# Altium PCB 16X16_covert Board.PcbDoc
Units mil, origin at the board's own origin, x right, y up, seen from the top; angles counter-clockwise.
Board outline 3425.2 x 582.68 mil, 2 copper layers (Top Layer, Bottom Layer); 4 components, 1 nets, 68 pads, 58 vias.
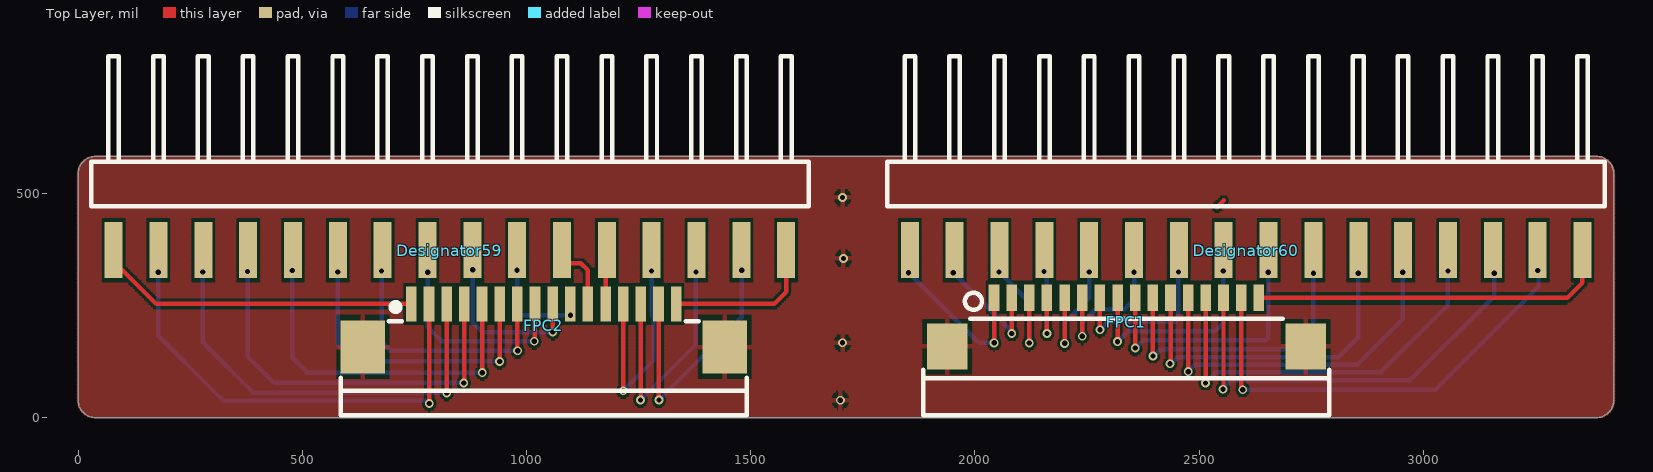
[diagram p0: Top Layer view]
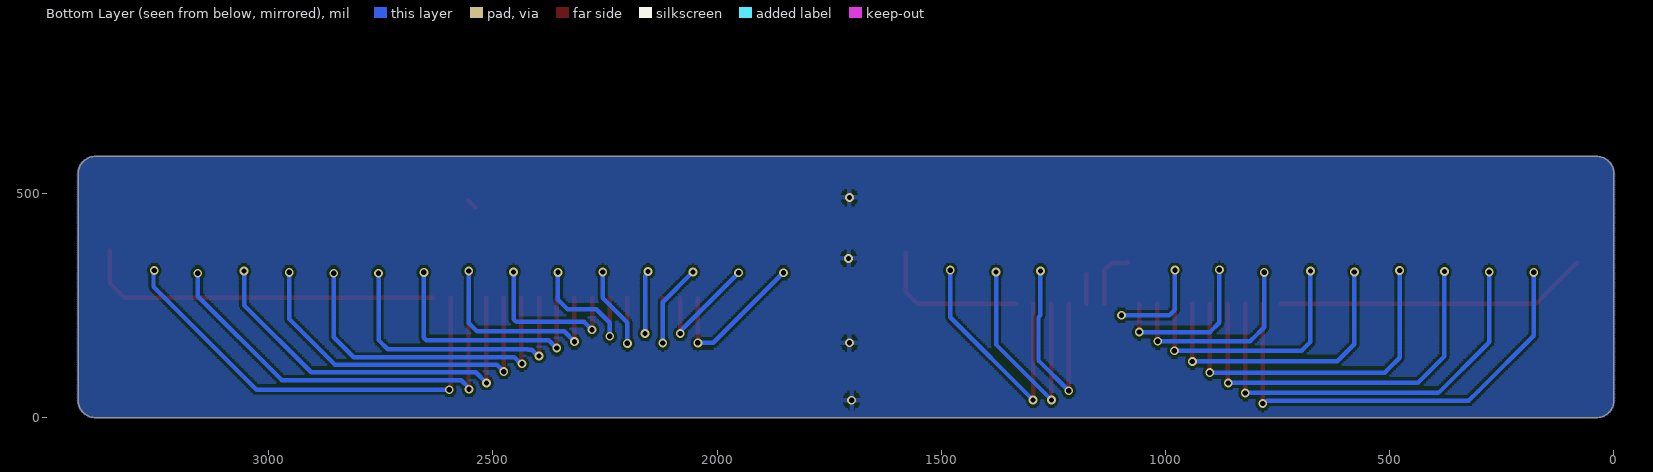
[diagram p1: Bottom Layer view, seen from below]

## Layer stack, top to bottom
Top Solder: solder mask 0.4, Solder Resist, Dk 3.5
Top Layer: signal copper 1.4
Dielectric 1: dielectric 12.6, FR-4, Dk 4.8
Bottom Layer: signal copper 1.4
Bottom Solder: solder mask 0.4, Solder Resist, Dk 3.5

## Board outline
39.37,0 cw(c39.37,39.37) 0,39.37 0,543.31 cw(c39.37,543.31) 39.37,582.68 3385.83,582.68 cw(c3385.83,543.31) 3425.2,543.31 3425.2,39.37 cw(c3385.83,39.37) 3385.83,0

## Design rules (kind name [scope] priority, off if disabled: settings)
Clearance [All] p1: gap=6 ignorepadtopadclearanceinfootprint=FALSE
PolygonConnect [All] p1: connectstyle=Relief reliefconductorwidth=10 reliefentries=4 polygonreliefangle="90 Angle" airgapwidth=10
RoutingVias [All] p1: holewidth=28 width=50 viastyle="Through Hole" minholewidth=28 minwidth=50 maxholewidth=28 maxwidth=50
SolderMaskExpansion [All] p1: expansion=4 istentingtop=FALSE
Width [All] p1: maxlimit=10 minlimit=8 preferedwidth=8
30 further rules are at their usual default settings.

## Components (designator, comment, footprint, x,y, rotation, side; value= is the part's Value field where it differs from the comment)
Designator59 "Comment" CONN-SMD_16PINS 829.33,373.35 r0 top
Designator60 "Comment" CONN-SMD_16PINS 2604.92,373.35 r0 top
FPC1 "1.0K-FX-16PWB" FPC-SMD_16P-P1.00-HDGC_1.0K-FX-16PWB 2337.87,212.83 r0 top
FPC2 "X10B25U16T" FPC-SMD_X10B25U16T 1038.66,205.3 r0 top

## Footprints (in the part's own frame and the unit in brackets; to place one, negate y for a bottom-side part, rotate by r counter-clockwise, add the part's x,y. Pads: shape width x height; smd on the part's side, far side on the other; paste and mask are expansions set on the pad)
CONN-SMD_16PINS [mm] "16PINS_Horizontal Surface Mount_Switch arrangement"
  rect 1.02x3.17 smd mask+0.05: 1(-19.05,0) 2(-16.51,0) 3(-13.97,0) 4(-11.43,0) 5(-8.89,0) 6(-6.35,0) 7(-3.81,0) 8(-1.27,0) 9(1.27,0) 10(3.81,0) 11(6.35,0) 12(8.89,0) 13(11.43,0) 14(13.97,0) 15(16.51,0) 16(19.05,0)
  silkscreen extent -20.32,2.5 20.32,11
FPC-SMD_16P-P1.00-HDGC_1.0K-FX-16PWB [mm]
  rect 0.6x1.5 smd mask+0.05: 1(-7.5,1.375) 2(-6.5,1.375) 3(-5.5,1.375) 4(-4.5,1.375) 5(-3.5,1.375) 6(-2.5,1.375) 7(-1.5,1.375) 8(-0.5,1.375) 9(0.5,1.375) 10(1.5,1.375) 11(2.5,1.375) 12(3.5,1.375) 13(4.5,1.375) 14(5.5,1.375) 15(6.5,1.375) 16(7.5,1.375)
  rect 2.3x2.6 smd mask+0.05: 17(10.15,-1.375) 18(-10.15,-1.375)
  silkscreen extent -11.5,-5.27 11.5,1.67, body extent -11.5,-5.15 11.5,1.65, height 2.58
FPC-SMD_X10B25U16T [mm]
  rect 0.6x2 smd mask+0.051: 1(-7.5,1.225) 2(-6.5,1.225) 3(-5.5,1.225) 4(-4.5,1.225) 5(-3.5,1.225) 6(-2.5,1.225) 7(-1.5,1.225) 8(-0.5,1.225) 9(0.5,1.225) 10(1.5,1.225) 11(2.5,1.225) 12(3.5,1.225) 13(4.5,1.225) 14(5.5,1.225) 15(6.5,1.225) 16(7.5,1.225)
  rect 2.5x3 smd mask+0.051: 17(10.25,-1.225) 18(-10.25,-1.225)
  silkscreen extent -11.5,-5.08 11.5,1.25, body extent -11.5,-5.37 11.5,1.38, height 2.46

## Part data
FPC1: library part FPC_16P_抽屉式下接, JLCPCB Part Class="Extended Part", LCSC Part Name="1mm P数:16 抽屉式 下接", Manufacturer=HDGC(华德共创), Operating Temperature Range=-20℃~+85℃, Add into BOM=yes, Contact Type=下接, Convert to PCB=yes, Datasheet=https://atta.szlcsc.com/upload/public/pdf/source/20211102/926C0C24B01018ECCB068402A8A27F57.pdf, Device=1.0K-FX-16PWB, FFC, FCB Thickness=0.3mm, Height Above Board=2.5mm, Locking Feature=抽屉式, Manufacturer Part=1.0K-FX-16PWB, Mounting Type=卧贴, Name=1.0K-FX-16PWB, Number of Contacts=16, Pitch=1mm, Supplier=LCSC, Supplier Footprint=SMD,P=1mm, Supplier Part=C2914075, Symbol=1.0K-FX-16PWB
FPC2: library part FPC_16P_抽屉式上接, JLCPCB Part Class="Extended Part", LCSC Part Name="1mm P数:16 抽屉式 上接 镀锡", Manufacturer="XKB Connectivity(中国星坤)", Operating Temperature Range=-40℃~+85℃, Welding Temperature (Max)=260℃, Add into BOM=yes, Contact Material=磷青铜, Contact Plating=金, Contact Type=上接, Convert to PCB=yes, Datasheet=https://atta.szlcsc.com/upload/public/pdf/source/20211011/E8BDE13A8FA62B089EE070F29D883999.pdf, Device=X10B25U16T, FFC, FCB Thickness=0.3mm, Height Above Board=2.5mm, Locking Feature=抽屉式, Manufacturer Part=X10B25U16T, Mounting Type=卧贴, Name=X10B25U16T, Number of Contacts=16, Pitch=1mm, Supplier=LCSC, Supplier Footprint=SMD,P=1mm, Supplier Part=C500194, Symbol=X10B25U16T

## Via types
v1: diameter 19.68, hole 11.81, Top Layer to Bottom Layer, tented both sides, 58 vias

## Nets (pads, with @x,y where several pads share a name; then routed paths per layer and width w, separated by ;. In a path a pad name is that pad's centre, name@x,y a point inside that pad or via, vN(x,y) a via of type N, cw(c..) or ccw(c..) an arc to the next point about the centre after c; other vN are vias at no path point)
GND: FPC1.17 FPC1.18 FPC2.17 FPC2.18
  other v1: 1700,39 1705,167 1707,355 1705,491
pads on no net: Designator59.1 Designator59.2 Designator59.3 Designator59.4 Designator59.5 Designator59.6 Designator59.7 Designator59.8 Designator59.9 Designator59.10 Designator59.11 Designator59.12 Designator59.13 Designator59.14 Designator59.15 Designator59.16 Designator60.1 Designator60.2 Designator60.3 Designator60.4 Designator60.5 Designator60.6 Designator60.7 Designator60.8 Designator60.9 Designator60.10 Designator60.11 Designator60.12 Designator60.13 Designator60.14 Designator60.15 Designator60.16 FPC1.1 FPC1.2 FPC1.3 FPC1.4 FPC1.5 FPC1.6 FPC1.7 FPC1.8 FPC1.9 FPC1.10 FPC1.11 FPC1.12 FPC1.13 FPC1.14 FPC1.15 FPC1.16 FPC2.1 FPC2.2 FPC2.3 FPC2.4 FPC2.5 FPC2.6 FPC2.7 FPC2.8 FPC2.9 FPC2.10 FPC2.11 FPC2.12 FPC2.13 FPC2.14 FPC2.15 FPC2.16
copper on no net: | length 17742.2
  Top Layer w10: 82.33,345.35 174.14,253.53 743.39,253.53 ; 782.76,253.53 783.04,253.25 783.04,31.63 v1(783.33,31.35) ; v1@821.33,54.35 v1(822.13,55.14) 822.13,253.53 ; v1(860.33,77.35) 860.91,77.93 860.91,252.95 861.5,253.53 ; 900.87,253.53 900.87,253.88 901.33,254.35 v1(901.33,100.35) ; 940.24,253.53 v1(940.24,125.44) v1@940.33,125.35 ; 979.61,253.53 979.97,253.17 979.97,149.71 v1(980.33,149.35) ; v1(1017.33,170.35) 1018.15,171.17 1018.15,252.71 1018.98,253.53 ; 1058.35,253.53 1058.35,191.33 v1@1059.33,190.35 ; 1084.33,346.35 1086.33,344.35 1121.33,344.35 1137.09,328.59 1137.09,253.53 ; 1176.33,320.35 1176.46,320.22 1176.46,253.53 ; 1215.83,253.53 v1(1215.83,59.85) v1@1216.33,59.35 ; v1(1254.33,39.35) 1254.76,39.78 1254.76,253.1 1255.2,253.53 ; 1294.57,253.53 1295.45,252.65 v1(1295.45,39.23) ; 1333.94,253.53 1552.52,253.53 1579.33,280.35 1579.33,367.35 ; v1(2042.97,166.71) 2042.97,266.59 ; v1(2082.15,187.53) 2082.15,266.78 ; v1(2121.33,166.35) 2121.34,266.96 ; v1@2160.33,187.35 v1(2160.71,187.73) 2160.71,266.96 ; 2200.08,266.96 v1(2200.08,165.6) v1@2200.33,165.35 ; v1(2239.33,181.35) 2239.45,181.47 2239.45,266.96 ; 2278.82,266.96 v1(2278.82,195.86) v1@2279.33,195.35 ; 2318.19,266.96 v1(2318.19,169.49) v1@2318.33,169.35 ; 2357.56,266.96 v1(2357.56,155.12) v1@2358.33,154.35 ; 2396.93,266.96 2396.93,137.75 v1@2397.33,137.35 ; v1(2435.33,120.35) 2436.3,121.32 2436.3,266.96 ; v1@2475.33,102.35 v1(2475.67,102.69) 2475.67,266.96 ; v1(2514.33,77.35) 2515.04,78.06 2515.04,266.96 ; 2539.84,469.27 2554.92,484.35 ; v1(2553.33,63.35) 2554.41,64.43 2554.41,266.96 ; 2593.78,266.96 2593.78,68.52 2597.33,64.97 v1(2597.33,62.35) ; 2633.15,266.96 3320.94,266.96 3329.33,275.35 3354.92,300.94 3354.92,373.35
  Bottom Layer w10: v1(179,324) 179,182.68 302.33,59.35 324.33,37.35 774.71,37.35 780.71,31.35 v1(783.33,31.35) ; v1(278,325) 278,168.68 287.33,159.35 391.53,55.14 v1(822.13,55.14) ; v1(378,326) 378,136.68 437.33,77.35 v1(860.33,77.35) ; v1(478,328) 478,133.68 504.33,107.35 511.33,100.35 v1(901.33,100.35) ; v1(579,325) 579,163.86 617.42,125.44 v1(940.24,125.44) ; v1(677,327) 677,168.68 692.35,153.33 696.33,149.35 v1(980.33,149.35) ; v1(780,324) 780,201.68 807.35,174.33 811.33,170.35 v1(1017.33,170.35) ; v1(880,330) 880,211.68 900.84,190.84 v1(1058.84,190.84) ; v1(979,329) 979,240.68 991.33,228.35 v1(1098.33,228.35) ; v1(1215.83,59.85) 1283.33,127.35 1283.33,223.7 1279,228.03 v1(1279,327) ; v1(1254.33,39.35) 1378,163.02 v1(1378,325) ; v1(1295.45,39.23) 1480,223.78 1480,280.41 v1(1480,329) ; v1(1852,323) 1852.68,323 1873.44,302.24 2008.96,166.71 v1(2042.97,166.71) ; v1(1952,323) 2080.3,194.7 2080.3,189.38 v1(2082.15,187.53) ; v1(2054,325) 2121.33,257.67 v1(2121.33,166.35) ; v1(2154,326) 2154,323.38 2160.71,316.67 v1(2160.71,187.73) ; v1(2200.08,165.6) 2200.08,212.1 2255,267.02 2255,299.03 v1(2255,325) ; v1(2239.33,181.35) 2239.33,211.35 2268.33,240.35 2269.33,241.35 2333.33,241.35 2355,263.02 2355,296.53 v1(2355,324) ; v1(2278.82,195.86) 2278.97,195.86 2296.46,213.35 2409.33,213.35 2448.14,213.35 2454,219.2 2454,273.96 v1(2454,325) ; v1(2318.19,169.49) 2341.05,192.35 2363.33,192.35 2523.33,192.35 2535.33,192.35 2554,211.02 2554,274.03 v1(2554,327) ; v1(2357.56,155.12) 2358.23,155.12 2375.46,172.35 2384.33,172.35 2648.14,172.35 2654,178.2 2654,258.02 v1(2654,324) ; v1(2397.13,137.55) 2399.75,137.55 2413.55,151.35 2421.33,151.35 2422.33,152.35 2566.33,152.35 2734.35,152.35 2755,173 v1(2755,322) ; v1(2435.33,120.35) 2437.95,120.35 2451.95,134.35 2462.33,134.35 2810.35,134.35 2855,179 v1(2855,322) ; v1(2475.67,102.69) 2491.33,118.35 2852.35,118.35 2954,220 v1(2954,324) ; v1(2514.33,77.35) 2538.33,101.35 2905.35,101.35 3055,251 3055,297.46 v1(3055,327) ; v1(2553.33,63.35) 2553.33,65.97 2570.83,83.47 2596.45,83.47 2970.45,83.47 3158,271.02 v1(3158,322) ; v1(2597.33,62.35) 3027.35,62.35 3256.85,291.85 3256.85,326.15 v1(3255,328)

## Polygon pours and split planes (outlines as drawn)
GND on Bottom Layer "GND_L02_P001" (hatched Horizontal grid 5 track 6, remove dead copper, pour order 1): 39.37,0 cw(c39.37,39.37) 0,39.37 0,543.31 cw(c39.37,543.31) 39.37,582.68 3385.83,582.68 cw(c3385.83,543.31) 3425.2,543.31 3425.2,39.37 cw(c3385.83,39.37) 3385.83,0
GND on Top Layer "GND_L01_P000" (hatched Horizontal grid 5 track 6, remove dead copper, pour order 0): 0,39.37 0,543.31 cw(c39.37,543.31) 39.37,582.68 3385.83,582.68 cw(c3385.83,543.31) 3425.2,543.31 3425.2,39.37 cw(c3385.83,39.37) 3385.83,0 39.37,0 cw(c39.37,39.37)

## Silkscreen, mask and mechanical layers (free items; w line width, h text height)
Mechanical 1:
  the board outline again, w2